# EAGLE board Gibbot v3 (EAGLE 5.12)
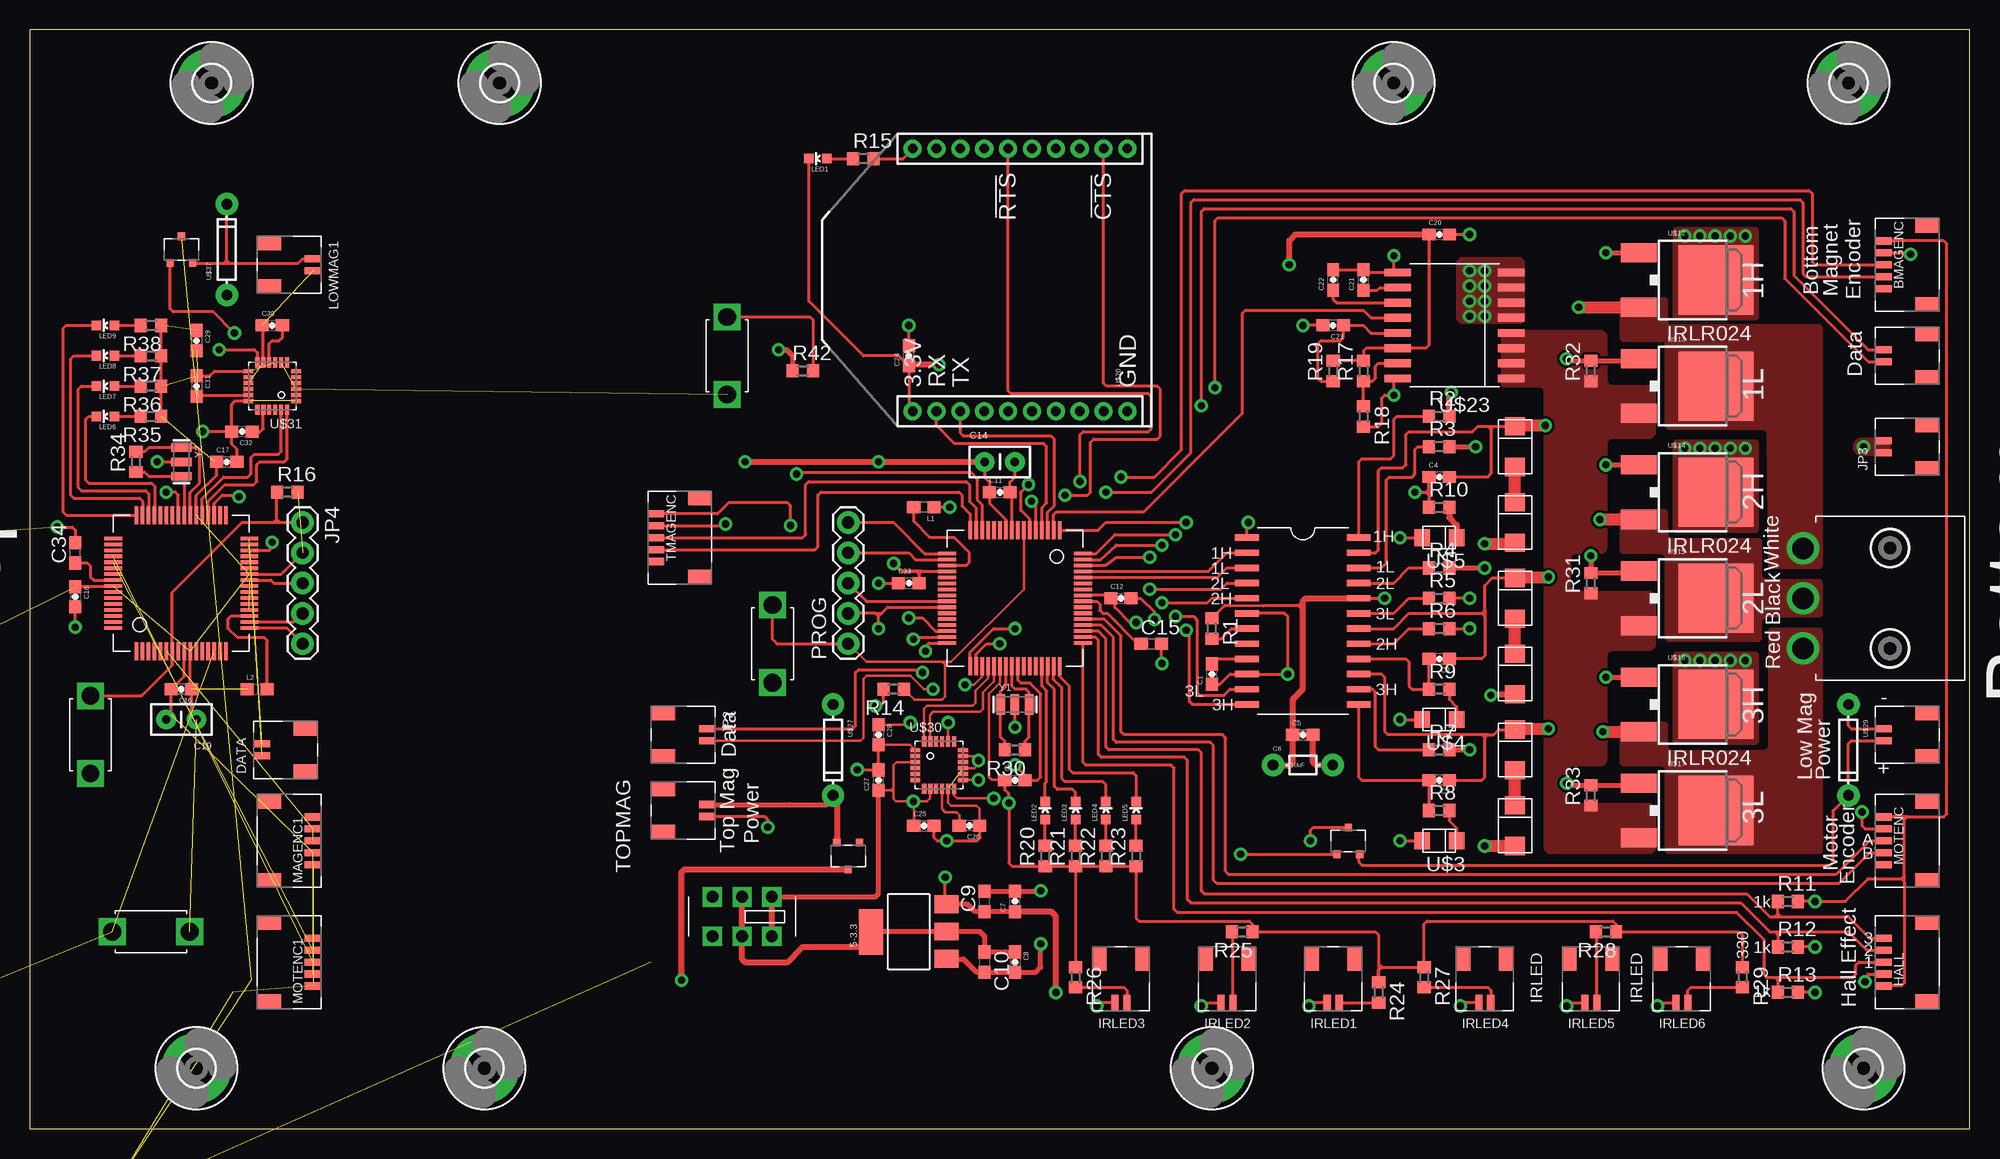
[diagram p0: board, top side]
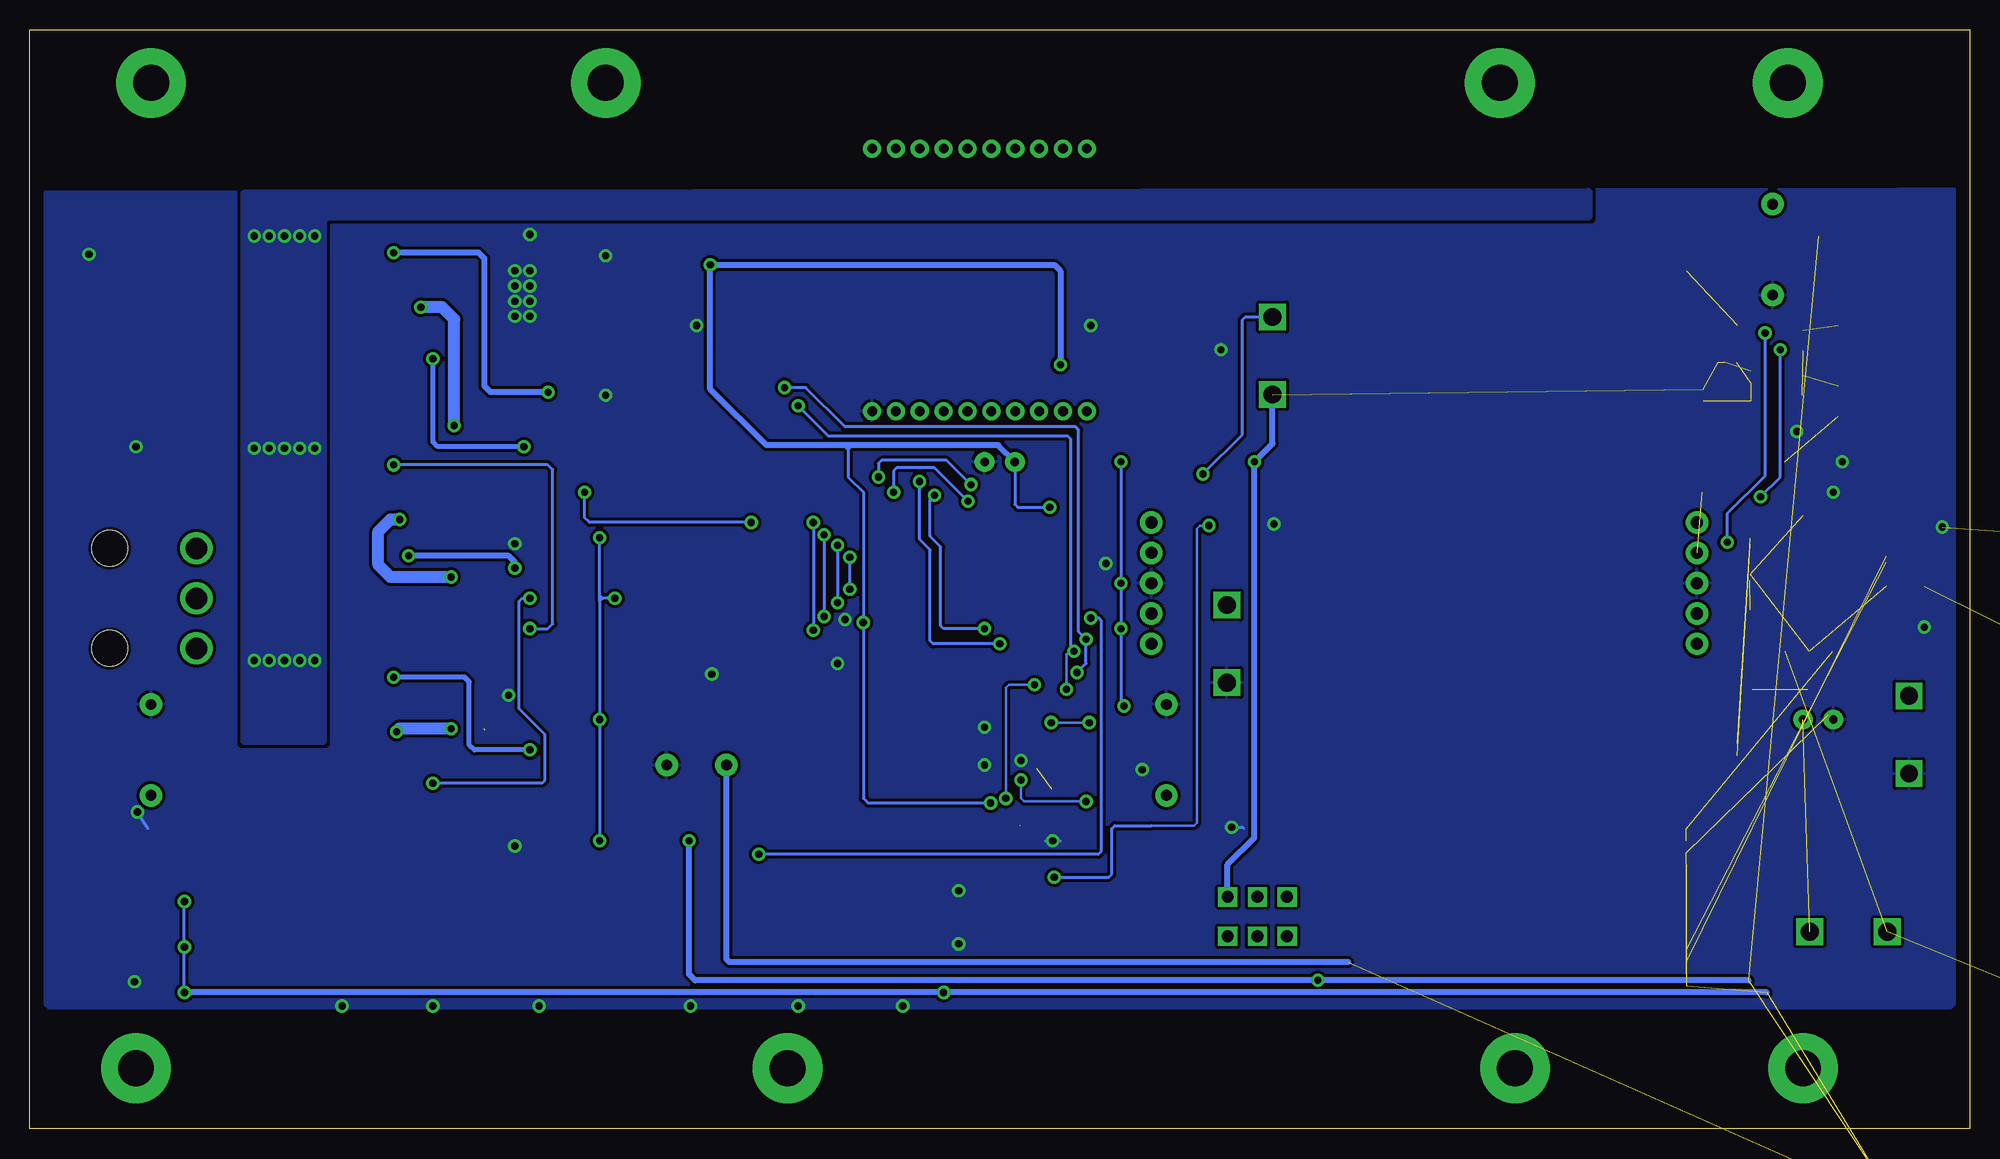
[diagram p1: board, bottom side, seen from below]

Size 162.56 x 92.08 mm. Coordinates in mm from the lower left corner, seen from the top.
Outline: 0,0 162.56,0 162.56,92.08 0,92.08 0,0
Copper layers (1*16): Top 0.035mm / dielectric 1.5mm / Bottom 0.035mm
Design rules "SparkFun *": minimum track width 8mil, minimum drill 20mil, track to track 8mil, track to pad 8mil, pad to pad 0mil, via to via 8mil, smd to smd 8mil, copper to edge 10mil, drill to drill 8mil, minimum pad ring 12mil, minimum via ring 10mil, stop-mask expansion 4mil, vias tented up to drill 25mil, thermal gap 10mil
tKeepout: area 10.2,0 to 162.6,9.5; area 0,82.5 to 162.6,92.1; area 0,0 to 161.3,9.5

## Footprints (pad centres in the part's own frame; a part is rotated, then mirrored left to right if it is on the bottom)
SOT223 = smd 1.499 x 2.007: 1 -2.261,-3.15; 2 0.025,-3.15; 3 2.311,-3.15 | smd 3.81 x 2.007: 4 0,3.15
JST-SH-5 = smd 0.6 x 1.35: 1 2,4.675; 2 1,4.675; 3 0,4.675; 4 -1,4.675; 5 -2,4.675 | smd 1.2 x 2: P$6 -3.3,1; P$7 3.3,1
0603-CAP = smd 1.1 x 1: 1 -0.85,0; 2 0.85,0
AXIAL-5MM = drill 0.9 pad 1.88 round: P$1 -2.5,0; P$2 2.5,0
C0603 = smd 1.1 x 1: 1 -0.85,0; 2 0.85,0
CAP-PTH-SMALL2 = drill 0.7 pad 1.651 round: 1 0,0; 2 2.54,0
SMA-DIODE = smd 1.27 x 1.47: A -2.15,0; C 2.15,0
JST-SH-2 = smd 0.6 x 1.35: 1 0.5,4.675; 2 -0.5,4.675 | smd 1.2 x 2: P$6 -1.8,1; P$7 1.8,1
3,0-PAD = drill 3 pad 5.842 round: B3,0 0,0
1X05 = drill 1.016 pad 1.88 round: 1 0,0; 2 2.54,0; 3 5.08,0; 4 7.62,0; 5 10.16,0
0603 = smd 1.1 x 1: 1 -0.85,0; 2 0.85,0
AIUR-08 = drill 0.7 square: 1 -2,-2.5; 2 -2,2.5; 3 2,-2.5; 4 2,2.5
COOPER_UP4B = smd 12 x 4.3: 1 0,8.9; 2 0,-8.9
LED-0603 = smd 0.8 x 0.8: A 0,-0.75; C 0,0.75
TACTILE_SWITCH = drill 1.5 square: 1 -3.25,0; 2 3.25,0
39-30-3036 = drill 1.803 round: 1 4.191,0; 2 0,0; 3 -4.191,0 | hole 3: -4.204,-7.29; 4.204,-7.29
R0603 = smd 1 x 1.1: 1 -0.85,0; 2 0.85,0
TQFP64_10X10 = smd 1.5 x 0.3: 1 -5.7,3.75; 2 -5.7,3.25; 3 -5.7,2.75; 4 -5.7,2.25; 5 -5.7,1.75; 6 -5.7,1.25; 7 -5.7,0.75; 8 -5.7,0.25; 9 -5.7,-0.25; 10 -5.7,-0.75; 11 -5.7,-1.25; 12 -5.7,-1.75; 13 -5.7,-2.25; 14 -5.7,-2.75; 15 -5.7,-3.25; 16 -5.7,-3.75; 33 5.7,-3.75; 34 5.7,-3.25; 35 5.7,-2.75; 36 5.7,-2.25; 37 5.7,-1.75; 38 5.7,-1.25; 39 5.7,-0.75; 40 5.7,-0.25; 41 5.7,0.25; 42 5.7,0.75; 43 5.7,1.25; 44 5.7,1.75; 45 5.7,2.25; 46 5.7,2.75; 47 5.7,3.25; 48 5.7,3.75 | smd 0.3 x 1.5: 17 -3.75,-5.7; 18 -3.25,-5.7; 19 -2.75,-5.7; 20 -2.25,-5.7; 21 -1.75,-5.7; 22 -1.25,-5.7; 23 -0.75,-5.7; 24 -0.25,-5.7; 25 0.25,-5.7; 26 0.75,-5.7; 27 1.25,-5.7; 28 1.75,-5.7; 29 2.25,-5.7; 30 2.75,-5.7; 31 3.25,-5.7; 32 3.75,-5.7; 49 3.75,5.7; 50 3.25,5.7; 51 2.75,5.7; 52 2.25,5.7; 53 1.75,5.7; 54 1.25,5.7; 55 0.75,5.7; 56 0.25,5.7; 57 -0.25,5.7; 58 -0.75,5.7; 59 -1.25,5.7; 60 -1.75,5.7; 61 -2.25,5.7; 62 -2.75,5.7; 63 -3.25,5.7; 64 -3.75,5.7
SOIC24-W = smd 0.533 x 1.981: 1 -6.985,-4.686; 2 -5.715,-4.686; 3 -4.445,-4.686; 4 -3.175,-4.686; 5 -1.905,-4.686; 6 -0.635,-4.686; 7 0.635,-4.686; 8 1.905,-4.686; 9 3.175,-4.686; 10 4.445,-4.686; 11 5.715,-4.686; 12 6.985,-4.686; 13 6.985,4.686; 14 5.715,4.686; 15 4.445,4.686; 16 3.175,4.686; 17 1.905,4.686; 18 0.635,4.686; 19 -0.635,4.686; 20 -1.905,4.686; 21 -3.175,4.686; 22 -4.445,4.686; 23 -5.715,4.686; 24 -6.985,4.686
D0-219AB = smd 1.3 x 1.4: AN 1.45,0; CATH -1.45,0
DO-214AC = smd 1.524 x 1.676: AN 1.702,0; CATH -1.702,0
DPAK = smd 5.791 x 6.274: D 0,1.587 | smd 1.6 x 3: G -2.286,-4.851; S 2.286,-4.851
XBEE-SILK = drill 0.8 pad 1.524 round: 1 -11,20; 2 -11,18; 3 -11,16; 4 -11,14; 5 -11,12; 6 -11,10; 7 -11,8; 8 -11,6; 9 -11,4; 10 -11,2; 11 11,2; 12 11,4; 13 11,6; 14 11,8; 15 11,10; 16 11,12; 17 11,14; 18 11,16; 19 11,18; 20 11,20
SOIC16-W = smd 0.65 x 2.25: 1 -4.445,-4.75; 2 -3.175,-4.75; 3 -1.905,-4.75; 4 -0.635,-4.75; 5 0.635,-4.75; 6 1.905,-4.75; 7 3.175,-4.75; 8 4.445,-4.75; 9 4.445,4.75; 10 3.175,4.75; 11 1.905,4.75; 12 0.635,4.75; 13 -0.635,4.75; 14 -1.905,4.75; 15 -3.175,4.75; 16 -4.445,4.75
SOT23F = smd 0.6 x 0.65: D 0,1.125; G -0.95,-1.125; S 0.95,-1.125
DIODE-1N4148 = drill 0.9 pad 1.88 round: A -3.81,0; C 3.81,0
LGA24_4X4 = smd 0.8 x 0.35: 1 -2,1.25; 2 -2,0.75; 3 -2,0.25; 4 -2,-0.25; 5 -2,-0.75; 6 -2,-1.25; 13 2,-1.25; 14 2,-0.75; 15 2,-0.25; 16 2,0.25; 17 2,0.75; 18 2,1.25 | smd 0.35 x 0.85: 7 -1.25,-1.975; 8 -0.75,-1.975; 9 -0.25,-1.975; 10 0.25,-1.975; 11 0.75,-1.975; 12 1.25,-1.975; 19 1.25,1.975; 20 0.75,1.975; 21 0.25,1.975; 22 -0.25,1.975; 23 -0.75,1.975; 24 -1.25,1.975
TSSOP16 = smd 0.45 x 1.05: 1 -2.275,-2.775; 2 -1.625,-2.775; 3 -0.975,-2.775; 4 -0.325,-2.775; 5 0.325,-2.775; 6 0.975,-2.775; 7 1.625,-2.775; 8 2.275,-2.775; 9 2.275,2.775; 10 1.625,2.775; 11 0.975,2.775; 12 0.325,2.775; 13 -0.325,2.775; 14 -0.975,2.775; 15 -1.625,2.775; 16 -2.275,2.775 | smd 2.8 x 2.8: 17 0,0
SLIDE_SWITCH = drill 1 square: 1 -2.489,1.651; 2 0,1.651; 3 2.489,1.651; 4 2.489,-1.651; 5 0,-1.651; 6 -2.489,-1.651
DIODE-HV = smd 2.2 x 2.4: A 2.454,0; C -2.454,0
RESONATOR-SMD = smd 0.7 x 1.7: 1 -1.2,0; 2 0,0; 3 1.2,0

## Placement (x,y rotation side)
5-3.3  REG1117  [SOT223]  73.66,16.51 90 top
BMAGENC  [JST-SH-5]  160.02,72.39 90 top
C1  DNI  [0603-CAP]  99.06,38.1 90 top
C2  .03uF  [0603-CAP]  118.11,29.21 180 top
C3  .03uF  [0603-CAP]  118.11,39.37 180 top
C4  .03uF  [0603-CAP]  118.11,54.61 0 top
C5  .1uF  [0603-CAP]  106.68,33.02 0 top
C6  10uF  [AXIAL-5MM]  106.68,30.48 0 top
C7  [0603-CAP]  82.55,19.05 90 top
C8  [0603-CAP]  82.55,13.97 270 top
C9  [C0603]  80.01,19.05 90 top
C10  [C0603]  80.01,13.97 270 top
C11  .1uF  [0603-CAP]  81.28,53.34 0 top
C12  .1uF  [0603-CAP]  91.44,44.45 0 top
C13  .1uF  [0603-CAP]  82.55,29.21 0 top
C14  10uF  [CAP-PTH-SMALL2]  80.01,55.88 0 top
C15  [C0603]  93.98,40.64 0 top
C16  .1uF  [0603-CAP]  12.7,36.83 180 top
C17  .1uF  [0603-CAP]  16.51,55.88 0 top
C18  .1uF  [0603-CAP]  3.81,44.58 270 top
C19  10uF  [CAP-PTH-SMALL2]  13.97,34.29 180 top
C20  .1uF  [0603-CAP]  118.11,74.93 0 top
C21  1nF  [0603-CAP]  111.76,71.12 90 top
C22  DNI  [0603-CAP]  109.22,71.12 90 top
C23  FAULT  [0603-CAP]  109.22,67.31 180 top
C24  .1uF  [0603-CAP]  73.66,64.77 90 top
C25  10nF  [0603-CAP]  74.93,25.4 0 top
C26  .1uF  [0603-CAP]  78.74,25.4 180 top
C27  .1uF  [0603-CAP]  71.12,29.21 90 top
C28  2.2nF  [0603-CAP]  71.12,33.02 270 top
C29  10nF  [0603-CAP]  13.97,66.04 270 top
C30  .1uF  [0603-CAP]  20.32,67.31 0 top
C31  .1uF  [0603-CAP]  13.97,62.23 270 top
C32  2.2nF  [0603-CAP]  17.78,58.42 180 top
C33  .1uF  [0603-CAP]  73.66,45.72 0 top
C34  [C0603]  3.81,48.26 90 top
C35  1nF  [0603-CAP]  -39.37,-13.97 0 top  (outside the outline)
C36  100pF  [0603-CAP]  -39.37,-17.78 0 top  (outside the outline)
C37  4.7uF  [0603-CAP]  -44.45,-64.77 0 top  (outside the outline)
C38  100pf  [0603-CAP]  -44.45,-68.58 0 top  (outside the outline)
C39  10uF  [0603-CAP]  -44.45,-72.39 0 top  (outside the outline)
C40  0.1uF  [0603-CAP]  -44.45,-76.2 0 top  (outside the outline)
C41  0.1uF  [0603-CAP]  -44.45,-80.01 0 top  (outside the outline)
C42  [0603-CAP]  -44.45,-83.82 0 top  (outside the outline)
D1  [SMA-DIODE]  -59.69,-88.9 0 top  (outside the outline)
D2  [SMA-DIODE]  -59.69,-100.33 0 top  (outside the outline)
DATA  [JST-SH-2]  24.13,31.75 90 top
H1  MOUNT-PAD-ROUND3.0  [3,0-PAD]  99.06,5.08 0 top
H2  MOUNT-PAD-ROUND3.0  [3,0-PAD]  153.67,5.08 0 top
H3  MOUNT-PAD-ROUND3.0  [3,0-PAD]  152.4,87.63 0 top
H4  MOUNT-PAD-ROUND3.0  [3,0-PAD]  114.3,87.63 0 top
H5  MOUNT-PAD-ROUND3.0  [3,0-PAD]  38.1,5.08 0 top
H6  MOUNT-PAD-ROUND3.0  [3,0-PAD]  39.37,87.63 0 top
H7  MOUNT-PAD-ROUND3.0  [3,0-PAD]  15.24,87.63 0 top
H8  MOUNT-PAD-ROUND3.0  [3,0-PAD]  13.97,5.08 0 top
HALL  [JST-SH-5]  160.02,13.97 90 top
IRLED1  [JST-SH-2]  109.22,15.24 180 top
IRLED2  [JST-SH-2]  100.33,15.24 180 top
IRLED3  [JST-SH-2]  91.44,15.24 180 top
IRLED4  [JST-SH-2]  121.92,15.24 180 top
IRLED5  [JST-SH-2]  130.81,15.24 180 top
IRLED6  [JST-SH-2]  138.43,15.24 180 top
IRLED7  [JST-SH-2]  -31.75,44.45 0 top  (outside the outline)
IRLED8  [JST-SH-2]  -24.13,44.45 0 top  (outside the outline)
IRLED9  [JST-SH-2]  -16.51,44.45 0 top  (outside the outline)
JP1  [JST-SH-2]  160.02,64.77 90 top
JP2  [JST-SH-2]  52.07,33.02 270 top
JP3  [JST-SH-2]  160.02,57.15 90 top
JP4  [1X05]  22.86,50.8 270 top
L1  [0603]  74.93,52.07 180 top
L2  [0603]  19.05,36.83 0 top
L3  56uH  [AIUR-08]  -54.61,-73.66 0 top  (outside the outline)
L4  6.8uH  [COOPER_UP4B]  -71.12,-90.17 0 top  (outside the outline)
LED1  [LED-0603]  66.04,81.28 90 top
LED2  [LED-0603]  85.09,26.67 0 top
LED3  [LED-0603]  87.63,26.67 0 top
LED4  [LED-0603]  90.17,26.67 0 top
LED5  [LED-0603]  92.71,26.67 0 top
LED6  [LED-0603]  6.35,59.69 90 top
LED7  [LED-0603]  6.35,62.23 90 top
LED8  [LED-0603]  6.35,64.77 90 top
LED9  [LED-0603]  6.35,67.31 90 top
LOWMAG  [JST-SH-2]  160.02,33.02 90 top
LOWMAG1  [JST-SH-2]  19.05,72.39 270 top
MAGENC1  [JST-SH-5]  19.05,24.13 270 top
MAINRESET  TACTILE_SWITCH  [TACTILE_SWITCH]  62.23,40.64 270 top
MAINUSER  TACTILE_SWITCH  [TACTILE_SWITCH]  58.42,64.77 90 top
MOT  [39-30-3036]  148.59,44.45 90 top
MOTENC  [JST-SH-5]  160.02,24.13 90 top
MOTENC1  [JST-SH-5]  19.05,13.97 270 top
PROG  [1X05]  68.58,40.64 90 top
R1  10k  [R0603]  99.06,41.91 270 top
R2  [R0603]  118.11,59.69 0 top
R3  [R0603]  118.11,57.15 0 top
R4  [R0603]  118.11,46.99 0 top
R5  [R0603]  118.11,44.45 0 top
R6  [R0603]  118.11,41.91 0 top
R7  [R0603]  118.11,31.75 0 top
R8  [R0603]  118.11,26.67 0 top
R9  [R0603]  118.11,36.83 0 top
R10  [R0603]  118.11,52.07 0 top
R11  1k  [R0603]  147.32,19.05 0 top
R12  1k  [R0603]  147.32,15.24 0 top
R13  1k  [R0603]  147.32,11.43 0 top
R14  2.2k  [R0603]  72.39,36.83 180 top
R15  1k  [R0603]  69.85,81.28 0 top
R16  2.2k  [R0603]  21.59,53.34 0 top
R17  VOC1  [R0603]  111.76,63.5 90 top
R18  VOC2  [R0603]  111.76,59.69 270 top
R19  330k  [R0603]  109.22,63.5 90 top
R20  1k  [R0603]  85.09,22.86 90 top
R21  1k  [R0603]  87.63,22.86 90 top
R22  1k  [R0603]  90.17,22.86 90 top
R23  1k  [R0603]  92.71,22.86 90 top
R24  330  [R0603]  113.03,11.43 270 top
R25  330  [R0603]  101.6,16.51 180 top
R26  330  [R0603]  87.63,12.7 270 top
R27  330  [R0603]  116.84,12.7 270 top
R28  330  [R0603]  132.08,16.51 180 top
R29  330  [R0603]  143.51,12.7 270 top
R30  1M  [R0603]  82.55,31.75 180 top
R31  20k  [R0603]  130.81,45.72 90 top
R32  20k  [R0603]  130.81,63.5 90 top
R33  20k  [R0603]  130.81,27.94 90 top
R34  1M  [R0603]  8.89,55.88 90 top
R35  1k  [R0603]  10.16,59.69 180 top
R36  1k  [R0603]  10.16,62.23 180 top
R37  1k  [R0603]  10.16,64.77 180 top
R38  1k  [R0603]  10.16,67.31 180 top
R39  330  [R0603]  -33.02,31.75 0 top  (outside the outline)
R40  330  [R0603]  -27.94,31.75 0 top  (outside the outline)
R41  330  [R0603]  -22.86,31.75 0 top  (outside the outline)
R42  2.2k  [R0603]  64.77,63.5 0 top
R43  2.2k  [R0603]  -34.29,0 0 top  (outside the outline)
R44  33.2k  [R0603]  -39.37,-8.89 0 top  (outside the outline)
R45  43k  [R0603]  -39.37,-22.86 0 top  (outside the outline)
R46  11k  [R0603]  -39.37,-29.21 0 top  (outside the outline)
R47  154k  [R0603]  -44.45,-29.21 0 top  (outside the outline)
R48  56.2k  [R0603]  -44.45,-35.56 0 top  (outside the outline)
R49  10.7k  [R0603]  -44.45,-40.64 0 top  (outside the outline)
R50  39k  [R0603]  -44.45,-45.72 0 top  (outside the outline)
R51  2.2k  [R0603]  -44.45,-50.8 0 top  (outside the outline)
R52  2.2k  [R0603]  -44.45,-55.88 0 top  (outside the outline)
R53  100k  [R0603]  -44.45,-60.96 0 top  (outside the outline)
SECRESET  TACTILE_SWITCH  [TACTILE_SWITCH]  5.08,33.02 270 top
SECUSER  TACTILE_SWITCH  [TACTILE_SWITCH]  10.16,16.51 180 top
TMAGENC  [JST-SH-5]  57.15,49.53 90 top
TOPMAG  [JST-SH-2]  52.07,26.67 270 top
U$1  DSPIC33EP512MC806  [TQFP64_10X10]  82.55,44.45 270 top
U$2  HIP4086  [SOIC24-W]  106.68,42.55 270 top
U$3  [D0-219AB]  118.11,24.13 180 top
U$4  [D0-219AB]  118.11,34.29 180 top
U$5  [D0-219AB]  118.11,49.53 180 top
U$6  [DO-214AC]  124.46,57.15 270 top
U$7  [DO-214AC]  124.46,50.8 270 top
U$8  [DO-214AC]  124.46,31.75 270 top
U$9  [DO-214AC]  124.46,25.4 270 top
U$10  [DO-214AC]  124.46,44.45 270 top
U$11  [DO-214AC]  124.46,38.1 270 top
U$12  IRLR024  [DPAK]  139.7,71.12 270 top
U$13  IRLR024  [DPAK]  139.7,62.23 270 top
U$14  IRLR024  [DPAK]  139.7,53.34 270 top
U$15  IRLR024  [DPAK]  139.7,44.45 270 top
U$16  IRLR024  [DPAK]  139.7,35.56 270 top
U$17  IRLR024  [DPAK]  139.7,26.67 270 top
U$20  XBEE-1B2  [XBEE-SILK]  93.98,71.12 90 top
U$22  DSPIC33EP512MC806  [TQFP64_10X10]  12.7,45.72 90 top
U$23  ACS716  [SOIC16-W]  119.38,67.31 90 top
U$26  SSM3K329R  [SOT23F]  68.58,22.86 180 top
U$27  [DIODE-1N4148]  67.31,31.75 270 top
U$28  SSM3K329R  [SOT23F]  110.49,24.13 0 top
U$29  [DIODE-1N4148]  152.4,31.75 270 top
U$30  MPU-9150  [LGA24_4X4]  76.2,30.48 0 top
U$31  MPU-9150  [LGA24_4X4]  20.32,62.23 180 top
U$35  LT3508  [TSSOP16]  -30.48,-7.62 0 top  (outside the outline)
U$36  SSM3K329R  [SOT23F]  12.7,73.66 0 top
U$37  [DIODE-1N4148]  16.51,73.66 90 top
U$38  SLIDE_SWTHROUGHHOLE  [SLIDE_SWITCH]  59.69,17.78 180 top
U$43  [DIODE-HV]  -57.15,-106.68 0 top  (outside the outline)
U$45  [DIODE-HV]  -74.93,-106.68 0 top  (outside the outline)
U$47  [DIODE-1N4148]  -52.07,-114.3 0 top  (outside the outline)
Y1  RESONATORSMD  [RESONATOR-SMD]  82.55,35.56 0 top
Y2  RESONATORSMD  [RESONATOR-SMD]  12.7,55.88 270 top

## Library data of the parts
5-3.3 BMAGENC C1-C42 D1 D2 DATA H1-H8 HALL IRLED1-IRLED9 JP1-JP4 L1-L4 LED1-LED9 LOWMAG LOWMAG1 MAGENC1 MAINRESET MAINUSER MOT MOTENC MOTENC1 PROG R1-R53 SECRESET SECUSER TMAGENC TOPMAG U$1-U$17 U$20 U$22 U$23 U$26-U$31 U$35-U$38 U$43 U$45 U$47 Y1 Y2 = Gibbot

## Nets
1HO: R2.2 U$12.G
1HS: C4.2 MOT.1 U$2.23 U$6.CATH U$12.S U$13.D
1LO: R3.2 R32.2 U$13.G
2HO: R6.2 U$14.G
2HS: C3.1 MOT.2 U$2.18 U$10.CATH U$14.S U$15.D
2LO: R4.2 R31.2 U$15.G
3.3V: C11.1 C12.1 C13.1 C14.1 C16.1 C17.1 C18.1 C19.1 C20.1 C24.1 C25.1 C27.1 C29.1 C31.1 C33.1 JP4.2 L1.1 L2.1 LED1.C MAINUSER.1 PROG.2 R14.2 R16.2 R17.2 R19.2 R20.1 R21.1 R22.1 R23.1 R24.1 R25.1 R26.1 R27.1 R28.1 R29.1 R35.1 R36.1 R37.1 R38.1 R39.1 R40.1 R41.1 SECUSER.1 U$1.10 U$1.26 U$1.38 U$1.57 U$20.1 U$22.10 U$22.26 U$22.38 U$22.57 U$23.14 U$30.3 U$30.8 U$30.9 U$30.13 U$31.3 U$31.8 U$31.9 U$31.13 U$38.1 U$38.6
3HO: R7.2 U$16.G
3HS: C2.1 MOT.3 U$2.15 U$8.CATH U$16.S U$17.D
3LO: R5.2 R33.2 U$17.G
5V: 5-3.3.3 BMAGENC.1 C7.1 C9.1 HALL.5 L4.2 MAGENC1.1 MOTENC1.1 MOTENC.1 R11.2 R12.2 R13.2 TMAGENC.1 U$43.A U$45.A
12V: C5.1 C6.P$1 C37.1 L3.2 R1.1 R47.1 R51.2 R52.2 U$2.20 U$3.AN U$4.AN U$5.AN
24V: C42.1 U$26.D U$28.D U$36.D U$47.C
48V: U$12.D U$14.D U$16.D
CTS: U$1.33 U$20.12
GND: 5-3.3.1 BMAGENC.2 C1.1 C5.2 C6.P$2 C7.2 C8.2 C9.2 C10.2 C11.2 C12.2 C13.2 C14.2 C15.2 C16.2 C17.2 C18.2 C19.2 C20.2 C21.2 C22.2 C23.2 C24.2 C25.2 C26.1 C27.2 C28.2 C29.2 C30.1 C31.2 C32.2 C33.2 C34.2 C35.2 C36.2 C37.2 C38.2 C39.2 D1.A D2.A HALL.4 IRLED1.1 IRLED2.1 IRLED3.1 IRLED4.1 IRLED5.1 IRLED6.1 IRLED7.1 IRLED8.1 IRLED9.1 JP3.1 JP3.2 JP4.3 LOWMAG1.1 LOWMAG.1 MAGENC1.2 MAINRESET.2 MOTENC1.2 MOTENC.2 PROG.3 R18.2 R42.1 R43.1 R44.1 R46.1 R49.1 SECRESET.2 TMAGENC.2 TOPMAG.1 U$1.9 U$1.20 U$1.25 U$1.41 U$2.6 U$2.10 U$7.AN U$9.AN U$11.AN U$20.10 U$22.9 U$22.20 U$22.25 U$22.41 U$23.5 U$23.6 U$23.7 U$23.8 U$23.9 U$23.16 U$27.A U$29.A U$30.1 U$30.11 U$30.15 U$30.17 U$30.18 U$31.1 U$31.11 U$31.15 U$31.17 U$31.18 U$35.17 U$37.A Y1.2 Y2.2
HALL1: HALL.3 R13.1 U$1.49
HALL2: HALL.2 R12.1 U$1.50
HALL3: HALL.1 R11.1 U$1.51
I_SENSE: U$1.2 U$23.12
IMU_INT1: U$1.35 U$30.12
IMU_INT2: U$22.35 U$31.12
IRLED6: IRLED6.2 R29.2
LED1: LED2.C U$1.45
LED1_2: LED6.C U$22.45
LED2: LED3.C U$1.46
LED2_2: LED7.C U$22.46
LED3: LED4.C U$1.47
LED3_2: LED8.C U$22.47
LED4: LED5.C U$1.48
LED4_2: LED9.C U$22.48
LOW_MAG: U$1.30 U$28.G
LOW_MAG_2: U$22.30 U$36.G
MAG1A: TMAGENC.3 U$1.15
MAG1B: TMAGENC.4 U$1.16
MAG2A: BMAGENC.3 U$1.6
MAG2A_2: MAGENC1.3 MAGENC1.4 U$22.6
MAG2B: BMAGENC.4 U$1.5
MAG2B_2: U$22.5
MCLR1: MAINRESET.1 PROG.1 R14.1 U$1.7
MCLR_2: JP4.1 R16.1 SECRESET.1 U$22.7
MOTA: MOTENC.3 U$1.53
MOTA_2: MOTENC1.3 U$22.52
MOTB: MOTENC.4 U$1.52
MOTB_2: MOTENC1.4 U$22.53
N$4: R1.2 U$2.7
N$5: C1.2 U$2.9
N$6: R2.1 U$2.24
N$7: R3.1 U$2.22
N$8: R4.1 U$2.21
N$9: R5.1 U$2.19
N$10: R6.1 U$2.17
N$11: R7.1 U$2.14
N$12: C2.2 R8.1 U$2.13
N$13: C3.2 R9.1 U$2.16
N$14: R15.2 U$20.20
N$15: LED1.A R15.1
N$16: C15.1 U$1.56
N$17: C4.1 R10.1 U$2.1
N$18: R10.2 U$5.CATH
N$19: R9.2 U$4.CATH
N$20: R8.2 U$3.CATH
N$21: U$6.AN U$7.CATH
N$22: U$8.AN U$9.CATH
N$23: U$10.AN U$11.CATH
N$24: C23.1 R19.1 U$23.13
N$25: C21.1 U$23.10
N$26: R44.2 U$35.13
N$27: C22.1 U$23.11
N$28: R31.1 R32.1 R33.1 U$13.S U$15.S U$17.S U$23.1 U$23.2 U$23.3 U$23.4
N$29: LED2.A R20.2
N$30: LED3.A R21.2
N$31: LED4.A R22.2
N$32: R17.1 R18.1 U$23.15
N$33: L2.2 U$22.19
N$34: U$1.13
N$35: C34.1 U$22.56
N$36: R34.2 U$22.39 Y2.1
N$37: R34.1 U$22.40 Y2.3
N$38: C36.1 R45.1
N$39: LED5.A R23.2
N$40: TOPMAG.2 U$26.S U$27.C
N$41: LOWMAG.2 U$28.S U$29.C
N$42: R30.2 U$1.39 Y1.1
N$43: R30.1 U$1.40 Y1.3
N$44: C26.2 U$30.10
N$45: IRLED1.2 R24.2
N$46: C28.1 U$30.20
N$47: IRLED2.2 R25.2
N$48: C30.2 U$31.10
N$49: IRLED3.2 R26.2
N$50: C32.1 U$31.20
N$51: IRLED4.2 R27.2
N$52: LOWMAG1.2 U$36.S U$37.C
N$53: IRLED5.2 R28.2
N$54: C35.1 U$35.1 U$35.8
N$55: LED6.A R35.2
N$56: 5-3.3.2 5-3.3.4 C8.1 C10.1 U$38.2 U$38.5
N$57: L1.2 U$1.19
N$58: LED7.A R36.2
N$59: LED8.A R37.2
N$60: LED9.A R38.2
N$61: IRLED7.2 R39.2
N$62: IRLED8.2 R40.2
N$63: IRLED9.2 R41.2
N$64: R45.2 U$35.15
N$65: R48.1 R49.2 U$35.9
N$66: R46.2 R47.2 U$35.16
N$67: R53.2 U$35.11 U$35.14
N$68: C38.1 R50.1
N$69: R50.2 U$35.10
N$70: C41.2 D2.C L4.1 U$35.6
N$71: C39.1 R48.2 R53.1
N$72: C40.2 D1.C L3.3 R51.1 R52.1 U$35.3
N$73: C40.1 U$35.2 U$43.C
N$74: C41.1 U$35.7 U$45.C
N$75: C42.2 U$35.4 U$35.5 U$35.12 U$47.A
PGEC1: PROG.5 U$1.17
PGEC_2: JP4.5 U$22.17
PGED1: PROG.4 U$1.18
PGED_2: JP4.4 U$22.18
PWM1H: U$1.61 U$2.2
PWM1L: U$1.60 U$2.3
PWM2H: U$1.63 U$2.5
PWM2L: U$1.62 U$2.4
PWM3H: U$1.1 U$2.12
PWM3L: U$1.64 U$2.11
RTS: U$1.34 U$20.16
RX: U$1.4 U$20.2
SCL1: U$1.37 U$30.23
SCL1_2: U$22.37 U$31.23
SCL2: JP1.1 JP2.1 U$1.32
SCL2_2: DATA.1 U$22.32
SDA1: U$1.36 U$30.24
SDA1_2: U$22.36 U$31.24
SDA2: JP1.2 JP2.2 U$1.31
SDA2_2: DATA.2 U$22.31
TOP_MAG: U$26.G
TX: U$1.3 U$20.3
USER: MAINUSER.2 R42.2 U$1.14
USER_2: R43.2 SECUSER.2 U$22.14

## Tracks (layer width: path | path; a pad name or v marks a point on that pad's centre or on a via)
1HO  (via drill 0.6)
  Top 0.406: v132.08,73.41 U$12.G
  Top 0.508: v119.13,61.72 118.96,61.56 R2.2
  Bottom 0.508: v119.13,61.72 123.95,61.72 124.46,62.23 124.46,72.9 124.97,73.41 v132.08,73.41
1HS  (via drill 0.6)
  Top 0.254: U$2.23 112.78,48.26 113.03,48.51 113.03,55.12 113.28,55.37 115.06,55.37 115.32,55.63 115.32,58.17 115.57,58.42 120.9,58.42 121.34,58.85 122.17,58.85 | C4.2 122.17,54.61 122.43,54.86 122.43,58.6 | 122.17,58.85 122.43,58.6 | U$6.CATH 122.68,58.85 122.43,58.6 | 122.17,58.85 123.44,58.85
  Top 1.016: U$6.CATH 124.54,58.93 v127,58.93 | v129.79,68.83 U$12.S
  Bottom 1.016: v127,58.93 127,67.82 128.02,68.83 v129.79,68.83
  pour Top (no thermals): 136.91,69.6 arc-90 137.16,69.34 137.16,67.56 arc90 137.41,67.31 149.86,67.31 arc-90 150.11,67.06 150.11,47.24 arc-90 149.86,46.99 146.05,46.99 arc-90 145.8,47.24 145.67,58.17 arc90 145.16,58.67 137.41,58.67 arc-90 137.16,58.93 137.16,65.79 arc90 136.91,66.04 133.6,66.04 arc-90 133.35,66.29 133.35,69.34 arc-90 133.6,69.6
1LO  (via drill 0.6)
  Top 0.406: U$13.G 134.68,64.35 R32.2 128.94,64.35 v128.78,64.52 | R3.2 v121.16,57.15
  Bottom 0.406: v128.78,64.52 128.78,57.56 128.37,57.15 v121.16,57.15
2HO  (via drill 0.6)
  Top 0.254: R6.2 v120.65,41.91
  Top 0.406: v132.08,55.63 U$14.G
  Bottom 0.254: v120.65,41.91 119.15,41.91 118.75,42.32 118.75,55.22 119.15,55.63 v132.08,55.63
2HS  (via drill 0.6)
  Top 0.254: U$2.18 114.3,41.91 115.57,43.18 121.67,43.18 | C3.1 121.67,39.37 121.92,39.62 121.92,42.93 | 121.67,43.18 121.92,43.43 | U$10.CATH 122.56,46.15 121.92,45.52 121.92,43.43 | 121.67,43.18 121.92,42.93 | 121.92,43.43 121.92,42.93
  Top 1.016: v131.57,51.05 U$14.S | U$10.CATH 124.54,46.23 v127.25,46.23
  Bottom 1.016: v127.25,46.23 132.33,46.23 133.35,47.24 133.35,50.04 132.33,51.05 v131.57,51.05
  pour Top (no thermals): 136.91,51.82 arc-90 137.16,51.56 137.16,49.91 arc90 137.67,49.4 144.78,49.4 arc-90 145.03,49.15 145.03,46.48 arc90 145.54,45.97 149.86,45.97 arc-90 150.11,45.72 150.11,43.18 arc-90 149.86,42.93 145.54,42.93 arc90 145.03,42.42 145.03,41.15 arc-90 144.78,40.89 137.41,40.89 arc-90 137.16,41.15 137.16,47.75 arc90 136.65,48.26 133.6,48.26 arc-90 133.35,48.51 133.35,51.56 arc-90 133.6,51.82
2LO  (via drill 0.6)
  Top 0.406: U$15.G 134.68,46.57 R31.2 v130.81,48.01 | R4.2 v121.92,46.99
  Bottom 0.508: v130.81,48.01 122.43,48.01 121.92,47.5 v121.92,46.99
3.3V  (via drill 0.6)  (16 unrouted)
  Top 0.203: U$1.38 81.3,37.36 80.39,36.45 80.39,29.46 80.62,29.23 81.43,29.23 | C27.1 72.14,28.36 | 72.14,28.36 72.39,28.61 72.39,30.48 72.64,30.73 U$30.3 | 74.08,27.43 C25.1 | v79.5,29.23 U$30.13 | 74.08,27.43 v74.04,27.43 72.59,27.43 72.39,27.64 72.39,28.16 | 74.08,27.43 75.2,27.43 75.45,27.69 U$30.8 | 72.39,28.16 72.19,28.36 72.14,28.36 | 72.39,28.16 72.39,29.84
  Top 0.254: C20.1 117.26,65.66 117.01,65.41 U$23.14 112.01,65.41 111.76,65.15 R17.2 R19.2 | R21.1 R20.1 82.3,22.01 82.04,22.26 v82.04,27.3 82.04,28.07 81.7,28.41 C13.1 81.45,29.21 81.43,29.23 | R21.1 R22.1 R23.1 92.71,17.65 92.96,17.4 102.2,17.4 102.45,17.14 R25.1 112.78,16.51 113.03,16.26 113.03,13.8 | C14.1 80.01,54.61 80.43,54.19 C11.1 80.43,52.41 81.8,51.04 U$1.10 | U$20.1 73.66,60.44 C24.1 72.81,64.77 69.85,64.77 65.29,69.33 LED1.C | 71.37,43.18 71.89,43.7 U$1.26 | U$1.57 90.34,44.7 | 90.34,44.7 C12.1 90.68,44.45 | C19.1 13.55,34.71 C16.1 13.45,36.93 U$22.10 | JP4.2 21.07,46.47 U$22.26 | C18.1 3.81,45.72 4.06,45.47 U$22.57 | U$22.38 13.95,53.07 15.66,54.78 C17.1 15.49,55.88 | v71.12,41.91 71.12,42.93 | 71.12,42.93 70.87,43.18 | 70.87,43.18 PROG.2 | 71.12,42.93 71.37,43.18 | 70.87,43.18 71.37,43.18 | R35.1 R36.1 R37.1 R38.1 | U$31.13 15.47,63.48 15.07,63.08 C31.1 | v77.09,52.07 L1.1 | v70.87,35.43 71.29,35.43 71.54,35.69 R14.2 | R21.1 R26.1 | 113.03,13.8 R24.1 113.03,13.3 113.28,13.55 | 113.28,13.55 R27.1 116.84,17.14 117.09,17.4 132.68,17.4 132.93,17.14 R28.1 143.26,16.51 143.51,16.26 R29.1 | 113.03,13.8 113.28,13.55 | U$30.8 U$30.9 | v71.12,45.72 C33.1 | v92.71,42.42 92.2,42.42 90.93,43.69 90.93,44.32 90.55,44.7 90.34,44.7
  Top 0.406: C27.1 71.12,19.68 70.87,19.43 U$38.6
  Top 0.508: C20.1 106.05,74.93 105.54,74.42 v105.54,72.39 | v76.2,64.01 73.75,64.01 C24.1 | U$38.1 U$38.6 | v59.94,55.88 v71.12,55.88 C14.1
  Bottom 0.203: v74.04,27.43 79.25,27.43 79.5,27.69 v79.5,29.23
  Bottom 0.254: v77.09,52.07 79.76,52.07 80.01,52.32 C14.1 | v70.87,35.43 71.12,35.69 v71.12,41.91 v71.12,45.72 v71.12,55.88 | 93.98,56.9 93.6,57.28 91.44,57.28 | 93.98,56.9 93.98,54.61 92.71,53.34 v92.71,42.42 92.71,27.69 92.33,27.3 v82.04,27.3 | 93.98,56.9 94.36,57.28 96.52,57.28
  Bottom 0.508: v76.2,64.01 76.2,71.88 76.71,72.39 v105.54,72.39 105.54,61.98 100.84,57.28 96.52,57.28 91.44,57.28 81.41,57.28 C14.1 | U$38.6 62.18,22.15 59.94,24.38 v59.94,55.88 58.42,57.4 MAINUSER.1
3HO  (via drill 0.6)
  Top 0.406: v132.08,37.85 U$16.G | R7.2 v120.65,31.75
  Bottom 0.406: v120.65,31.75 125.32,31.75 125.73,32.16 125.73,37.44 126.14,37.85 v132.08,37.85
3HS  (via drill 0.6)  (1 unrouted)
  Top 0.254: C2.1 121.67,29.21 121.92,29.46 121.92,32.77 | U$8.CATH 123.11,33.45 122.68,33.02 122.17,33.02 | 122.17,33.02 121.67,33.02 | 121.92,32.77 122.17,33.02 | 121.92,32.77 121.67,33.02 | 121.67,33.02 113.79,33.02 113.54,33.27 113.54,37.85 113.28,38.1 U$2.15
  Top 1.016: v131.83,33.27 U$16.S | 124.54,33.53 v127.25,33.53
  Bottom 1.016: v131.83,33.27 131.57,33.53 v127.25,33.53
  pour Top (no thermals): 136.91,34.04 arc-90 137.16,33.78 137.16,32.13 arc90 137.67,31.62 145.29,31.62 arc90 145.8,32.13 145.8,41.66 arc-90 146.05,41.91 149.86,41.91 arc-90 150.11,41.66 150.11,23.37 arc-90 149.86,23.11 137.41,23.11 arc-90 137.16,23.37 137.16,29.97 arc90 136.65,30.48 133.6,30.48 arc-90 133.35,30.73 133.35,33.78 arc-90 133.6,34.04
3LO  (via drill 0.6)
  Top 0.254: v120.65,44.45 R5.2
  Top 0.406: U$17.G 134.68,28.79 R33.2 128.94,28.79 v128.78,28.96
  Bottom 0.254: v120.65,44.45 121.28,44.45 121.54,44.2 121.54,35.18 119.38,33.02 119.38,29.21 119.63,28.96 v128.78,28.96
5V  (via drill 0.6)  (5 unrouted)
  Top 0.254: 156.84,20.95 154.05,20.95 152.15,19.05 v149.61,19.05 R11.2 | 157.1,25.88 156.84,26.13 MOTENC.1 | 156.84,20.95 157.1,20.7 | 157.1,20.7 157.1,12.22 156.84,11.97 HALL.5 | 156.84,20.95 157.1,21.21 | 157.1,20.7 157.1,21.21 | v149.61,15.24 R12.2 | v149.61,11.43 R13.2 | BMAGENC.1 160.4,74.39 160.66,74.14 160.66,26.38 160.4,26.13 157.35,26.13 | 157.1,25.88 157.35,26.13 | 157.1,21.21 157.1,25.88 | 157.35,26.13 156.62,26.13 | TMAGENC.1 57.63,51.53 58.55,52.45 63.5,52.45 63.75,52.2 v63.75,50.55 | v76.71,21.08 76.71,18.92 5-3.3.3
  Top 0.406: 5-3.3.3 78.59,18.82 79.21,18.2 C9.1 C7.1
  Top 0.508: v85.98,11.43 85.98,17.82 85.6,18.2 C7.1
  Bottom 0.203: 68.58,25.4 65.02,25.4 64.77,25.65 64.77,50.29 64.52,50.55 v63.75,50.55
  Bottom 0.254: v149.61,11.43 v149.61,15.24 v149.61,19.05 | 68.58,25.4 71.63,25.4 71.88,25.15 71.88,21.34 72.14,21.08 v76.71,21.08
  Bottom 0.508: 17.02,11.43 v85.98,11.43 v149.61,11.43
12V  (via drill 0.6)  (5 unrouted)
  Top 0.203: 103.38,43.81 100.58,43.81
  Top 0.254: v114.81,24.13 U$3.AN | v114.81,34.29 U$4.AN | v114.81,49.53 U$5.AN | 111.76,44.45 v113.54,44.45 | R1.1 100.11,43.81 100.58,43.81 | 106.68,43.43 106.3,43.81 | 106.3,43.81 106.68,44.2 | 106.3,43.81 103.38,43.81
  Top 0.508: 111.76,44.45 U$2.20 106.93,44.45 106.68,44.2 106.68,43.43 106.68,36.83 105.83,35.98 C5.1 105.83,30.73 105.58,30.48 C6.P$1
  Bottom 0.254: v114.81,24.13 v114.81,34.29 114.81,44.2 | v114.81,49.53 114.81,44.7 114.55,44.45 | 114.55,44.45 114.81,44.2 | v113.54,44.45 114.55,44.45 | 114.81,44.2 114.81,44.83
  Bottom 0.508: C6.P$1 104.18,14.22 103.93,13.97 52.07,13.97
24V  (via drill 0.6)  (3 unrouted)
  Top 0.254: U$28.D 107.57,25.25 107.31,25 v107.31,24.13
  Top 0.508: U$26.D 54.86,21.73 54.61,21.48 v54.61,12.45
  Bottom 0.508: v107.31,24.13 107.31,12.95 106.81,12.45 v54.61,12.45 18.54,12.45
48V  (via drill 0.6)
  other vias: 138.68,39.24 139.95,39.24 141.22,39.24 142.49,39.24 143.76,39.24 138.68,74.8 139.95,74.8 141.22,74.8 142.49,74.8 143.76,74.8 138.68,57.02 139.95,57.02 141.22,57.02 142.49,57.02 143.76,57.02
  pour Top (no thermals): 137.79,32.51 137.79,39.62 arc-90 138.05,39.88 144.53,39.88 arc-90 144.78,39.62 144.78,32.51 arc-90 144.53,32.26 138.05,32.26 arc-90
  pour Bottom (isolate 0.406, rank 3): 144.53,78.61 32,78.74 arc90 31.75,78.49 31.75,76.45 arc90 32,76.2 137.54,76.2 arc-90 137.79,75.95 137.79,32.51 arc90 138.05,32.26 144.53,32.26 arc90 144.78,32.51 144.78,78.36 arc90
  pour Top (no thermals): 137.79,50.29 137.79,57.4 arc-90 138.05,57.66 144.53,57.66 arc-90 144.78,57.4 144.78,50.29 arc-90 144.53,50.04 138.05,50.04 arc-90
  pour Top (no thermals): 137.79,68.07 137.79,75.18 arc-90 138.05,75.44 144.53,75.44 arc-90 144.78,75.18 144.78,68.07 arc-90 144.53,67.82 138.05,67.82 arc-90
CTS  (via drill 0.6)
  Top 0.254: U$20.12 89.98,62.48 90.23,62.23 94.49,62.23 94.74,61.98 94.74,58.04 94.49,57.78 89.15,57.78 88.9,57.53 88.9,53.34 88.65,53.09 v86.74,53.09 | U$1.33 78.8,39.94 80.77,41.91 v82.55,41.91
  Bottom 0.254: v82.55,41.91 85.98,41.91 86.23,42.16 86.23,48.77 87.12,49.66 87.12,52.7 v86.74,53.09
GND  (via drill 0.6)  (26 unrouted)
  Top 0.203: U$30.11 76.95,27.3 77.2,27.05 79.34,27.05 79.59,26.8 C26.1 | U$30.18 U$30.17 79.43,31.23 79.38,31.15 79.38,30.43 79.17,30.23 U$30.15 | 74.31,31.73 U$30.1 73.76,32.17 C28.2
  Top 0.254: C20.2 v120.65,74.93 | C22.2 C21.2 111.97,71.75 U$23.9 114.55,71.75 114.3,72.01 v114.3,73.15 | C23.2 v106.68,67.31 | U$23.16 114.3,62.53 v114.3,61.47 113.54,61.47 113.28,61.21 113.28,59.09 113.03,58.84 R18.2 | U$2.6 105.16,43.18 105.41,42.93 v105.41,38.1 U$2.10 100.58,38.1 99.73,37.25 C1.1 | PROG.3 70.1,44.2 U$1.25 | v82.55,33.66 Y1.2 | U$1.41 82.8,37.59 83.05,37.34 83.82,37.34 84.71,36.45 84.71,29.46 84.45,29.21 C13.2 83.4,29.63 v82.55,30.48 | U$30.1 74.18,31.75 | C14.2 82.55,54.61 82.13,54.19 C11.2 82.3,53.17 U$1.9 | 74.51,46.45 C33.2 | v72.39,47.37 73.06,46.7 74.26,46.7 74.51,46.45 | 74.76,46.7 U$1.20 | 74.51,46.45 74.76,46.7 | 74.76,46.7 73.7,46.7 | C24.2 v73.66,67.31 | HALL.4 154.05,12.97 153.8,12.72 v153.8,12.32 | BMAGENC.2 157.5,73.39 v157.61,73.28 | C19.2 11.85,34.71 C16.2 12.95,37.93 U$22.9 | JP4.3 20.45,45.72 20.19,45.97 U$22.25 | MOTENC.2 153.8,25.13 153.54,25.38 v153.54,26.54 | U$31.11 19.57,67.21 C30.1 | C32.2 16.93,60.73 17.18,60.98 U$31.18 | v10.67,55.88 Y2.2 | U$22.41 12.45,53.09 12.2,53.34 v11.43,53.34 | v3.81,42.04 C18.2 | C32.2 v14.48,58.42 | 17.78,55.88 C17.2 17.36,56.94 16.93,57.37 C32.2 | U$31.17 14.07,61.48 C31.2 | TOPMAG.1 61.59,26.17 61.85,25.92 v61.85,25.27 | TMAGENC.2 57.9,50.53 v58.29,50.67 | IRLED3.1 89.69,10.56 v89.41,10.29 | IRLED2.1 98.42,10.56 98.17,10.31 v98.17,10.29 | IRLED1.1 107.34,10.56 v107.19,10.29 | IRLED4.1 120.14,10.56 119.89,10.31 v119.89,10.29 | IRLED5.1 129.03,10.56 128.78,10.31 v128.78,10.29 | IRLED6.1 136.65,10.56 136.4,10.31 v136.4,10.29 | C34.2 3.81,50.16 3.56,50.42 v2.29,50.42 | C15.2 94.83,39.03 v94.87,38.99 | LOWMAG.1 152.65,33.52 152.4,33.77 U$29.A
  Top 0.254: C25.2 75.78,24.38 76.03,24.13 v76.83,24.13 79.38,24.13 79.63,24.38 79.63,25.4 | v79.5,30.86 79.5,31.15 79.43,31.23 | v69.34,30.1 71.08,30.1 C27.2 C28.2 | C12.2 93.09,44.45 94.23,43.31 v94.23,42.67
  Top 0.406: C9.2 C7.2 84.3,19.9 84.71,19.88 v84.71,19.94 | 76.95,14.39 5-3.3.1 76.83,14.22 78.23,14.22 79.34,13.12 C10.2 C8.2 84.3,13.12 84.71,13.53 v84.71,15.49 | R42.1 63.92,64.77 63.41,65.28 v62.74,65.28
  Top 0.508: U$11.AN 122.5,36.4 v122.43,36.32 | C6.P$2 107.78,30.48 107.53,30.73 C5.2
  Top 1.016: v121.92,23.7 U$9.AN | U$7.AN 124.38,49.02 v121.92,49.02
  Bottom 0.254: v82.55,33.66 82.55,33.4 | v82.55,30.48 82.55,30.61 | v72.39,47.37 72.64,47.24 | v153.54,26.54 152.65,25.15 | v153.8,12.32 154.05,12.19 | v157.61,73.28 157.73,73.28 157.86,73.41 | v10.67,55.88 10.67,56.01 | v11.43,53.34 11.56,53.47 11.43,53.47 | v3.81,42.04 3.68,42.16 | v14.48,58.42 14.48,58.55 | v61.85,25.27 60.96,25.27 60.83,25.15 | v58.29,50.67 58.67,50.67 58.8,50.55 | v89.41,10.29 89.28,10.54 | v98.17,10.29 98.17,10.41 | v107.19,10.29 107.31,10.41 | v119.89,10.29 120.02,10.29 | v128.78,10.29 128.78,10.54 | v136.4,10.29 136.4,10.41 | v94.87,38.99 95.12,39.12 | v94.23,42.67 94.36,42.55 94.49,42.55 | v76.83,24.13 76.83,24.38 | v69.34,30.1 69.34,30.23 | 77.47,24.13 76.2,24.13
  Bottom 0.406: v84.71,15.49 84.58,15.62 84.58,15.88 | v84.71,19.94 84.71,19.81 | v62.74,65.28 62.74,65.66
  other vias: 121.92,71.88 120.65,70.61 121.92,70.61 120.65,69.34 121.92,69.34 120.65,68.07 121.92,68.07 120.65,71.88 153.67,57.15
  pour Bottom (isolate 0.254, rank 4): 1.27,78.74 6.1,78.74 161.29,78.49 161.29,10.41 161.04,10.16 1.52,10.16 1.27,10.41
  pour Top (no thermals): 124.97,72.9 119.89,72.9 119.63,72.64 119.63,67.82 119.89,67.56 124.97,67.56 125.22,67.82 125.22,72.64
  pour Top (no thermals): 155.83,57.78 153.54,57.78 arc90 152.91,57.15 arc90 153.54,56.52 155.83,56.52
HALL1
  Top 0.254: U$1.49 88.25,30.73 88.5,30.48 95.63,30.48 95.89,30.23 95.89,18.41 96.14,18.16 143,18.16 145.29,15.88 145.29,12.95 145.54,12.7 146.22,12.7 | HALL.3 153.29,13.97 153.03,13.72 153.03,12.95 152.78,12.7 146.72,12.7 146.47,12.45 | 146.22,12.7 146.47,12.45 | 146.47,12.45 R13.1 | 146.22,12.7 147.7,12.7
HALL2
  Top 0.254: U$1.50 89.28,41.2 89.53,40.95 89.53,31.37 89.79,31.11 96.77,31.11 97.03,30.86 97.03,19.18 97.28,18.92 143.38,18.92 145.8,16.51 146.22,16.51 | 146.47,16.26 R12.1 | 146.47,16.26 146.72,16.51 | 146.22,16.51 146.47,16.26 | 146.22,16.51 146.72,16.51 | 146.72,16.51 152.4,16.51 153.94,14.97 HALL.2
HALL3
  Top 0.254: U$1.51 89.53,41.7 90.17,41.06 90.17,32 90.42,31.75 97.92,31.75 98.17,31.5 98.17,19.94 98.42,19.68 143.89,19.68 145.8,17.78 146.22,17.78 | 146.22,17.78 146.47,18.03 | 146.47,18.03 146.72,17.78 | 146.47,18.03 R11.1 | 146.22,17.78 146.72,17.78 | 146.72,17.78 152.4,17.78 154.21,15.97 HALL.1
I_SENSE
  Top 0.254: U$23.12 112.39,67.94 111.76,68.58 101.85,68.58 101.6,68.33 101.6,59.94 93.34,51.69 86.05,51.69 85.8,51.44 U$1.2
IMU_INT1  (via drill 0.6)
  Top 0.203: U$1.35 79.8,37.89 79.12,37.21 v78.36,37.21 | v80.77,27.69 77.7,27.69 77.45,27.94 U$30.12
  Bottom 0.203: v80.77,27.69 80.77,36.96 80.52,37.21 v78.36,37.21
IMU_INT2  (via drill 0.6)
  Top 0.254: U$31.12 19.07,65.02 18.82,65.28 v15.88,65.28 | U$22.35 15.45,52.41 16.13,53.09 17.4,53.09 v17.53,52.96
  Bottom 0.254: v15.88,65.28 15.88,54.61 v17.53,52.96
IRLED6
  Top 0.254: R29.2 139.18,11.85 138.93,11.6 IRLED6.2
LED1
  Top 0.254: U$1.45 84.8,37.12 85.22,36.7 85.22,29.08 85.09,28.96 LED2.C
LED1_2
  Top 0.254: U$22.45 10.45,53.85 10.2,54.1 4.95,54.1 4.7,54.36 4.7,59.44 4.95,59.69 LED6.C
LED2
  Top 0.254: U$1.46 85.3,37.38 85.85,36.83 85.85,28.7 86.11,28.45 87.38,28.45 87.63,28.19 LED3.C
LED2_2
  Top 0.254: U$22.46 9.95,53.21 9.7,53.47 4.32,53.47 4.06,53.72 4.06,61.98 4.32,62.23 LED7.C
LED3
  Top 0.254: LED4.C 90.17,28.83 89.92,29.08 86.74,29.08 86.49,29.34 86.49,36.96 85.8,37.64 U$1.47
LED3_2
  Top 0.254: U$22.47 9.45,52.58 9.2,52.83 3.68,52.83 3.43,53.09 3.43,64.52 3.68,64.77 LED8.C
LED4
  Top 0.254: U$1.48 86.3,37.91 87.12,37.08 87.12,30.1 87.38,29.84 92.46,29.84 92.71,29.59 LED5.C
LED4_2
  Top 0.254: U$22.48 3.05,51.42 2.79,51.67 2.79,67.06 3.05,67.31 LED9.C
LOW_MAG  (via drill 0.6)
  Top 0.254: v101.47,23 U$28.G | U$1.30 75.9,41.7 74.8,42.8 v73.66,42.8
  Bottom 0.254: v101.47,23 73.03,23 72.77,23.26 72.77,42.55 73.03,42.8 v73.66,42.8
LOW_MAG_2  (via drill 0.6)
  Top 0.254: U$36.G 11.75,68.71 12,68.45 15.37,68.45 v17.14,66.67 | v20.32,49.15 20.32,48.72 20.07,48.47 U$22.30
  Bottom 0.254: v17.14,66.67 17.14,54.74 20.32,51.56 v20.32,49.15
MAG1A
  Top 0.254: U$1.15 79.3,52.02 78.74,52.58 78.74,53.98 78.49,54.23 65.28,54.23 65.02,53.98 65.02,49.78 64.77,49.53 TMAGENC.3
MAG1B
  Top 0.254: U$1.16 78.8,51.5 78.11,52.2 78.11,53.09 77.85,53.34 66.29,53.34 66.04,53.09 66.04,48.78 65.79,48.53 TMAGENC.4
MAG2A  (via drill 0.6)
  Top 0.254: U$1.6 83.8,51.07 83.06,51.82 83.06,53.34 v83.69,53.98 | BMAGENC.3 149.61,72.39 149.35,72.64 149.35,78.36 149.1,78.61 96.77,78.61 96.52,78.36 96.52,56.9 94.23,54.61 v91.44,54.61
  Bottom 0.254: v83.69,53.98 85.72,56.01 91.19,56.01 91.44,55.75 v91.44,54.61
MAG2A_2  (2 unrouted)
MAG2B  (via drill 0.6)
  Top 0.254: U$1.5 84.3,52.23 v83.95,52.58 | BMAGENC.4 148.84,71.39 148.59,71.64 148.59,77.6 148.34,77.85 97.54,77.85 97.28,77.6 97.28,56.64 93.98,53.34 v90.17,53.34
  Bottom 0.254: v83.95,52.58 86.74,55.37 89.92,55.37 90.17,55.12 v90.17,53.34
MCLR1
  Top 0.203: U$1.7 83.3,45.2 77.22,39.12 76.96,39.12 | PROG.1 70.1,39.12 76.45,39.12 | 76.71,38.86 76.96,39.12 | 76.45,39.12 76.71,38.86 | 76.45,39.12 76.96,39.12 | R14.1 74.13,35.94 76.45,35.94 76.71,36.2 76.71,38.86
  Top 0.254: PROG.1 62.61,40.64 62.23,41.02 MAINRESET.1
MCLR_2
  Top 0.254: 20.7,51.05 20.95,50.8 JP4.1 | 20.45,50.8 17.78,50.8 11.95,44.97 U$22.7 11.95,38.98 arc-45 11.88,38.8 9.42,36.34 arc-45 9.24,36.27 SECRESET.1 | 20.45,50.8 20.7,51.05 | 20.45,50.8 21.34,50.8 | 20.7,51.05 20.7,53.09 20.57,53.34 R16.1
MOTA
  Top 0.254: U$1.53 90.04,42.7 91.44,41.3 91.44,33.27 91.69,33.02 99.95,33.02 100.2,32.77 100.2,21.59 100.46,21.34 151.38,21.34 154.18,24.13 MOTENC.3
MOTA_2  (1 unrouted)
MOTB
  Top 0.254: U$1.52 89.79,42.2 90.81,41.18 90.81,32.64 91.06,32.38 98.93,32.38 99.19,32.13 99.19,20.84 99.44,20.59 151.65,20.59 154.19,23.13 MOTENC.4
MOTB_2  (1 unrouted)
N$4
  Top 0.254: R1.2 99.86,41.06 100.71,41.91 U$2.7
N$5
  Top 0.254: C1.2 99.06,39.12 99.31,39.37 U$2.9
N$6
  Top 0.254: R2.1 114.55,59.69 114.3,59.44 114.3,56.39 114.05,56.13 111.62,56.13 111.37,55.88 U$2.24
N$7
  Top 0.254: U$2.22 113.26,46.99 113.67,47.4 113.67,54.36 113.92,54.61 115.82,54.61 116.08,54.86 116.08,56.9 116.33,57.15 R3.1
N$8
  Top 0.254: U$2.21 114.3,45.72 115.57,46.99 R4.1
N$9
  Top 0.254: U$2.19 114.3,43.18 115.57,44.45 R5.1
N$10
  Top 0.254: R6.1 115.57,41.91 114.3,40.64 U$2.17
N$11
  Top 0.254: R7.1 113.03,31.75 112.78,32 112.78,36.58 112.52,36.83 U$2.14
N$12
  Top 0.254: R8.1 C2.2 111.62,29.21 111.37,29.46 U$2.13
N$13
  Top 0.254: C3.2 R9.1 115.82,36.83 115.57,37.08 115.57,39.12 115.32,39.37 U$2.16
N$14
  Top 0.254: U$20.20 73.17,81.28 R15.2
N$15
  Top 0.254: LED1.A R15.1
N$16
  Top 0.254: U$1.56 89.41,44.2 89.66,43.95 89.66,43.43 89.92,43.18 90.3,43.18 92.84,40.64 C15.1
N$17  (via drill 0.6)
  Top 0.254: U$2.1 101.99,50.69 v102.11,50.8 | 117.26,52.98 C4.1 117.26,53.59 117.01,53.34 | R10.1 117.26,53.09 117.01,53.34 | v116.08,53.34 117.01,53.34
  Bottom 0.254: v116.08,53.34 116.08,51.21 115.67,50.8 v102.11,50.8
N$18
  Top 0.508: U$5.CATH 119.56,50.62 118.96,51.22 R10.2
N$19
  Top 0.254: U$4.CATH 119.56,35.38 118.96,35.98 R9.2
N$20
  Top 0.254: U$3.CATH 119.56,25.22 118.96,25.82 R8.2
N$21
  Top 1.016: U$7.CATH U$6.AN
N$22
  Top 1.016: U$9.CATH U$8.AN
N$23
  Top 1.016: U$11.CATH U$10.AN
N$24
  Top 0.254: U$23.13 112.39,66.67 111.76,67.31 C23.1 110.07,66.29 109.82,66.04 108.2,66.04 107.95,65.79 107.95,62.9 108.2,62.65 R19.1
N$25
  Top 0.254: C21.1 112.94,70.27 113.16,70.48 U$23.10
N$26  (1 unrouted)
N$27
  Top 0.254: C22.1 109.22,69.47 109.47,69.22 U$23.11
N$28
  pour Top (no thermals): 135.64,23.11 127.51,23.11 arc-90 127,23.62 127,61.72 arc90 126.49,62.23 123.44,62.23 123.44,66.8 131.57,66.8 arc-90 132.08,66.29 132.08,62.74 arc90 132.59,62.23 135.64,62.23 arc-90 136.14,61.72 136.14,58.42 arc-90 135.64,57.91 132.59,57.91 arc90 132.08,57.4 132.08,48.77 arc-90 131.57,48.26 129.54,48.26 arc90 129.03,47.75 129.03,45.47 arc90 129.54,44.96 135.64,44.96 arc-90 136.14,44.45 136.14,40.64 arc-90 135.64,40.13 132.59,40.13 arc90 132.08,39.62 132.08,30.99 arc-90 131.57,30.48 129.29,30.48 arc90 128.78,29.97 128.78,27.69 arc90 129.29,27.18 135.64,27.18 arc-90 136.14,26.67 136.14,23.62 arc-90
N$29
  Top 0.254: R20.2 LED2.A
N$30
  Top 0.254: R21.2 LED3.A
N$31
  Top 0.254: R22.2 LED4.A
N$32
  Top 0.254: U$23.15 113.03,64.14 112.78,63.88 112.78,62.9 112.52,62.65 R17.1 R18.1
N$33
  Top 0.254: L2.2 19.9,40.89 19.65,41.15 17.4,41.15 16.64,41.91 16.64,42.72 16.89,42.97 U$22.19
N$35
  Top 0.254: C34.1 4.83,47.41 5.08,47.16 5.08,46.22 5.33,45.97 U$22.56
N$36
  Top 0.254: U$22.39 13.45,53.33 14.22,54.1 14.22,56.83 13.97,57.08 Y2.1 9.96,57.08 9.61,56.73 R34.2
N$37
  Top 0.254: R34.1 9.61,55.03 9.96,54.68 Y2.3 12.95,54.43 U$22.40
N$38  (1 unrouted)
N$39
  Top 0.254: R23.2 LED5.A
N$40
  Top 0.406: 63.65,27.17 TOPMAG.2 66.81,27.17 U$27.C
  Top 0.508: U$26.S 67.63,27.62 U$27.C
N$41
  Top 0.254: U$28.S 111.38,22.94 111.38,22.35 111.63,22.1 150.88,22.1 151.13,22.35 151.13,26.67 U$29.C 152.4,32.27 152.65,32.52 LOWMAG.2
N$42
  Top 0.254: U$1.39 81.79,38.74 81.79,37.08 81.35,36.65 Y1.1 81.35,32.82 81.7,32.47 R30.2
N$43
  Top 0.254: U$1.40 82.3,37.08 82.55,36.83 83.5,36.83 83.75,36.58 Y1.3 83.75,32.82 83.4,32.47 R30.1
N$44
  Top 0.203: U$30.10 76.45,26.8 76.7,26.54 77.64,26.54 77.89,26.29 C26.2
N$45
  Top 0.254: R24.2 109.73,10.58 IRLED1.2
N$46  (via drill 0.6)
  Top 0.203: U$30.20 76.95,33.66 v76.96,34.04 | v73.79,34.04 73.66,33.87 C28.1
  Bottom 0.203: v73.79,34.04 v76.96,34.04
N$47
  Top 0.254: IRLED2.2 100.83,16.43 R25.2
N$48
  Top 0.254: U$31.10 20.07,65.79 20.32,66.04 20.92,66.04 21.17,66.29 C30.2
N$49
  Top 0.254: IRLED3.2 91.94,11.6 91.69,11.85 R26.2
N$50
  Top 0.254: C32.1 19.32,58.42 19.57,58.67 U$31.20
N$51
  Top 0.254: R27.2 122.17,11.85 122.42,11.6 IRLED4.2
N$52
  Top 0.254: 16.51,72.77 16.26,72.52 14.94,72.52 | 13.67,72.52 14.94,72.52 | 13.67,72.52 U$36.S 13.67,72.52 | 16.51,72.77 U$37.C | 16.51,72.77 16.76,72.52 22.48,72.52 22.85,72.89 LOWMAG1.2 | 14.94,72.52 17.53,72.52
N$53
  Top 0.254: R28.2 131.31,16.43 IRLED5.2
N$54  (2 unrouted)
N$55
  Top 0.254: LED6.A R35.2
N$56
  Top 0.406: C8.1 C10.1 80.01,16.13 79.6,16.54 5-3.3.2 70.54,16.54 5-3.3.4
  Top 0.508: 5-3.3.4 70.51,15.75 70,15.24 64.77,15.24 63.5,13.97 59.94,13.97 59.69,14.22 U$38.2 U$38.5
N$57
  Top 0.254: U$1.19 78.49,47.2 78.74,47.45 78.74,48.26 77.47,49.53 75.44,49.53 74.08,50.89 L1.2
N$58
  Top 0.254: LED7.A R36.2
N$59
  Top 0.254: LED8.A R37.2
N$60
  Top 0.254: LED9.A R38.2
N$61  (1 unrouted)
N$62  (1 unrouted)
N$63  (1 unrouted)
N$64  (1 unrouted)
N$65  (2 unrouted)
N$66  (2 unrouted)
N$67  (2 unrouted)
N$68  (1 unrouted)
N$69  (1 unrouted)
N$70  (3 unrouted)
N$71  (2 unrouted)
N$72  (5 unrouted)
N$73  (2 unrouted)
N$74  (2 unrouted)
N$75  (4 unrouted)
PGEC1
  Top 0.254: U$1.17 74.99,48.2 72.39,50.8 PROG.5
PGEC_2
  Top 0.254: JP4.5 21.53,41.97 U$22.17
PGED1
  Top 0.254: U$1.18 74.22,47.7 73.66,48.26 PROG.4
PGED_2
  Top 0.254: JP4.4 22.15,42.47 U$22.18
PWM1H
  Top 0.254: U$1.61 98.77,46.7 100.33,48.26 U$2.2
PWM1L
  Top 0.254: U$1.60 99.54,46.2 100.33,46.99 U$2.3
PWM2H  (via drill 0.6)
  Top 0.254: v94.87,48.9 91.06,48.9 89.74,47.7 U$1.63 | v94.87,44.07 98.68,44.07 99.06,44.45 U$2.5
  Bottom 0.254: v94.87,48.9 v94.87,44.07
PWM2L  (via drill 0.6)
  Top 0.254: U$1.62 90.17,47.2 91.1,47.88 v93.85,47.88 | v93.85,45.21 99.82,45.21 100.33,45.72 U$2.4
  Bottom 0.254: v93.85,47.88 v93.85,45.21
PWM3H  (via drill 0.6)
  Top 0.254: v96.9,41.78 97.16,41.53 97.16,35.81 97.41,35.56 U$2.12 | U$1.1 89.52,50.15 90.17,50.8 v96.9,50.8
  Bottom 0.254: v96.9,50.8 v96.9,41.78
PWM3L  (via drill 0.6)
  Top 0.254: v96.01,42.93 97.54,42.93 97.79,42.67 97.79,36.58 98.04,36.32 100.08,36.32 100.58,36.83 U$2.11 | v96.01,49.78 90.93,49.78 89.35,48.2 U$1.64
  Bottom 0.254: v96.01,49.78 v96.01,42.93
RTS  (via drill 0.6)
  Top 0.254: U$20.16 81.98,61.85 82.23,61.59 93.73,61.59 93.98,61.34 93.98,58.67 93.73,58.42 88.27,58.42 88.01,58.17 v88.01,54.23 | v81.28,40.64 80.19,40.64 79.3,39.75 U$1.34
  Bottom 0.254: v81.28,40.64 86.87,40.64 87.12,40.89 87.12,48.51 88.01,49.4 v88.01,54.23
RX
  Top 0.254: U$20.2 75.98,58.93 77.5,57.4 84.96,57.4 85.22,57.15 85.22,52.45 84.8,52.03 U$1.4
SCL1
  Top 0.203: U$30.23 75.45,34.67 75.7,34.92 79.63,34.92 79.88,35.18 79.88,36.58 80.8,37.49 U$1.37
SCL1_2
  Top 0.254: U$22.37 14.45,52.83 16.23,54.61 18.28,54.61 18.53,54.86 18.53,56.26 18.78,56.52 20.82,56.52 21.07,56.77 U$31.23
SCL2  (via drill 0.6)
  Top 0.203: JP2.1 69.6,32.52 69.85,32.77 69.85,37.72 70.1,37.97 73.79,37.97 74.93,36.83 v75.69,36.83
  Top 0.254: v75.06,40.01 75.06,40.45 75.31,40.7 U$1.32 | JP1.1 154.06,65.27 147.83,71.5 147.83,76.83 147.57,77.09 98.42,77.09 98.17,76.83 v98.17,60.58
  Bottom 0.203: v75.69,36.83 75.69,39.75 75.44,40.01 v75.06,40.01
  Bottom 0.254: v75.06,40.01 75.31,40.26 75.31,57.78 75.56,58.04 95.63,58.04 v98.17,60.58
SCL2_2  (1 unrouted)
SDA1
  Top 0.203: U$30.24 74.95,35.18 75.2,35.43 78.99,35.43 79.25,35.69 79.25,36.7 80.3,37.76 U$1.36
SDA1_2
  Top 0.254: U$22.36 14.95,52.58 16.35,53.98 18.78,53.98 19.03,54.23 19.03,55.63 19.28,55.88 21.32,55.88 21.57,56.13 U$31.24
SDA2  (via drill 0.6)
  Top 0.254: JP2.2 68.96,33.52 69.22,33.77 69.22,38.23 69.47,38.48 74.55,38.48 v74.8,38.23 | v74.04,41.02 74.35,41.2 U$1.31 | JP1.2 154.04,64.27 147.07,71.25 147.07,76.07 146.81,76.33 99.57,76.33 99.31,76.07 v99.31,62.1
  Bottom 0.254: v74.8,38.23 74.04,38.99 v74.04,41.02 74.68,41.66 74.68,58.55 74.93,58.8 94.23,58.8 97.54,62.1 v99.31,62.1
SDA2_2  (1 unrouted)
TX
  Top 0.254: U$20.3 77.98,58.29 78.23,58.04 85.6,58.04 85.85,57.78 85.85,52.2 85.3,51.65 U$1.3
USER  (via drill 0.6)
  Top 0.254: U$1.14 79.8,52.28 79.38,52.7 79.38,54.48 78.87,54.99 64.39,54.99 v64.26,54.86 | MAINUSER.2 65.37,68.02 65.62,67.77 R42.2
  Bottom 0.254: MAINUSER.2 60.71,68.02 60.96,67.77 60.96,58.17 v64.26,54.86
USER_2  (2 unrouted)

## Text on the board
tPlace: Bottom | Magnet | 1H | Encoder | IRLR024 | Data | 1L | 2H | 1H | 1H | IRLR024 | 1L | White | 1L | 2L | 2L | 2H | 3L | 2L | Black | Top | 2H | Red | 3L | 3H | - | Bottom | 3H | 3H | Data | IRLR024 | + | Low Mag | Power | 3L | Power | A | Top Mag | B | Motor | Encoder | 1k | 1k | 3 | 330 | 2 | 1 | IRLED | IRLED | 1k | Hall Effect